# Altium PCB GasMonitor5.PcbDoc (part 2 of 2)
Units mm, origin at the board's own origin, x right, y up, seen from the top; angles counter-clockwise.
Board outline 104.39 x 129.79 mm, 4 copper layers (Top Layer, Ground Layer, Power Layer, Bottom Layer), stack 0.75 mm thick; 155 components, 106 nets, 508 pads, 201 vias.
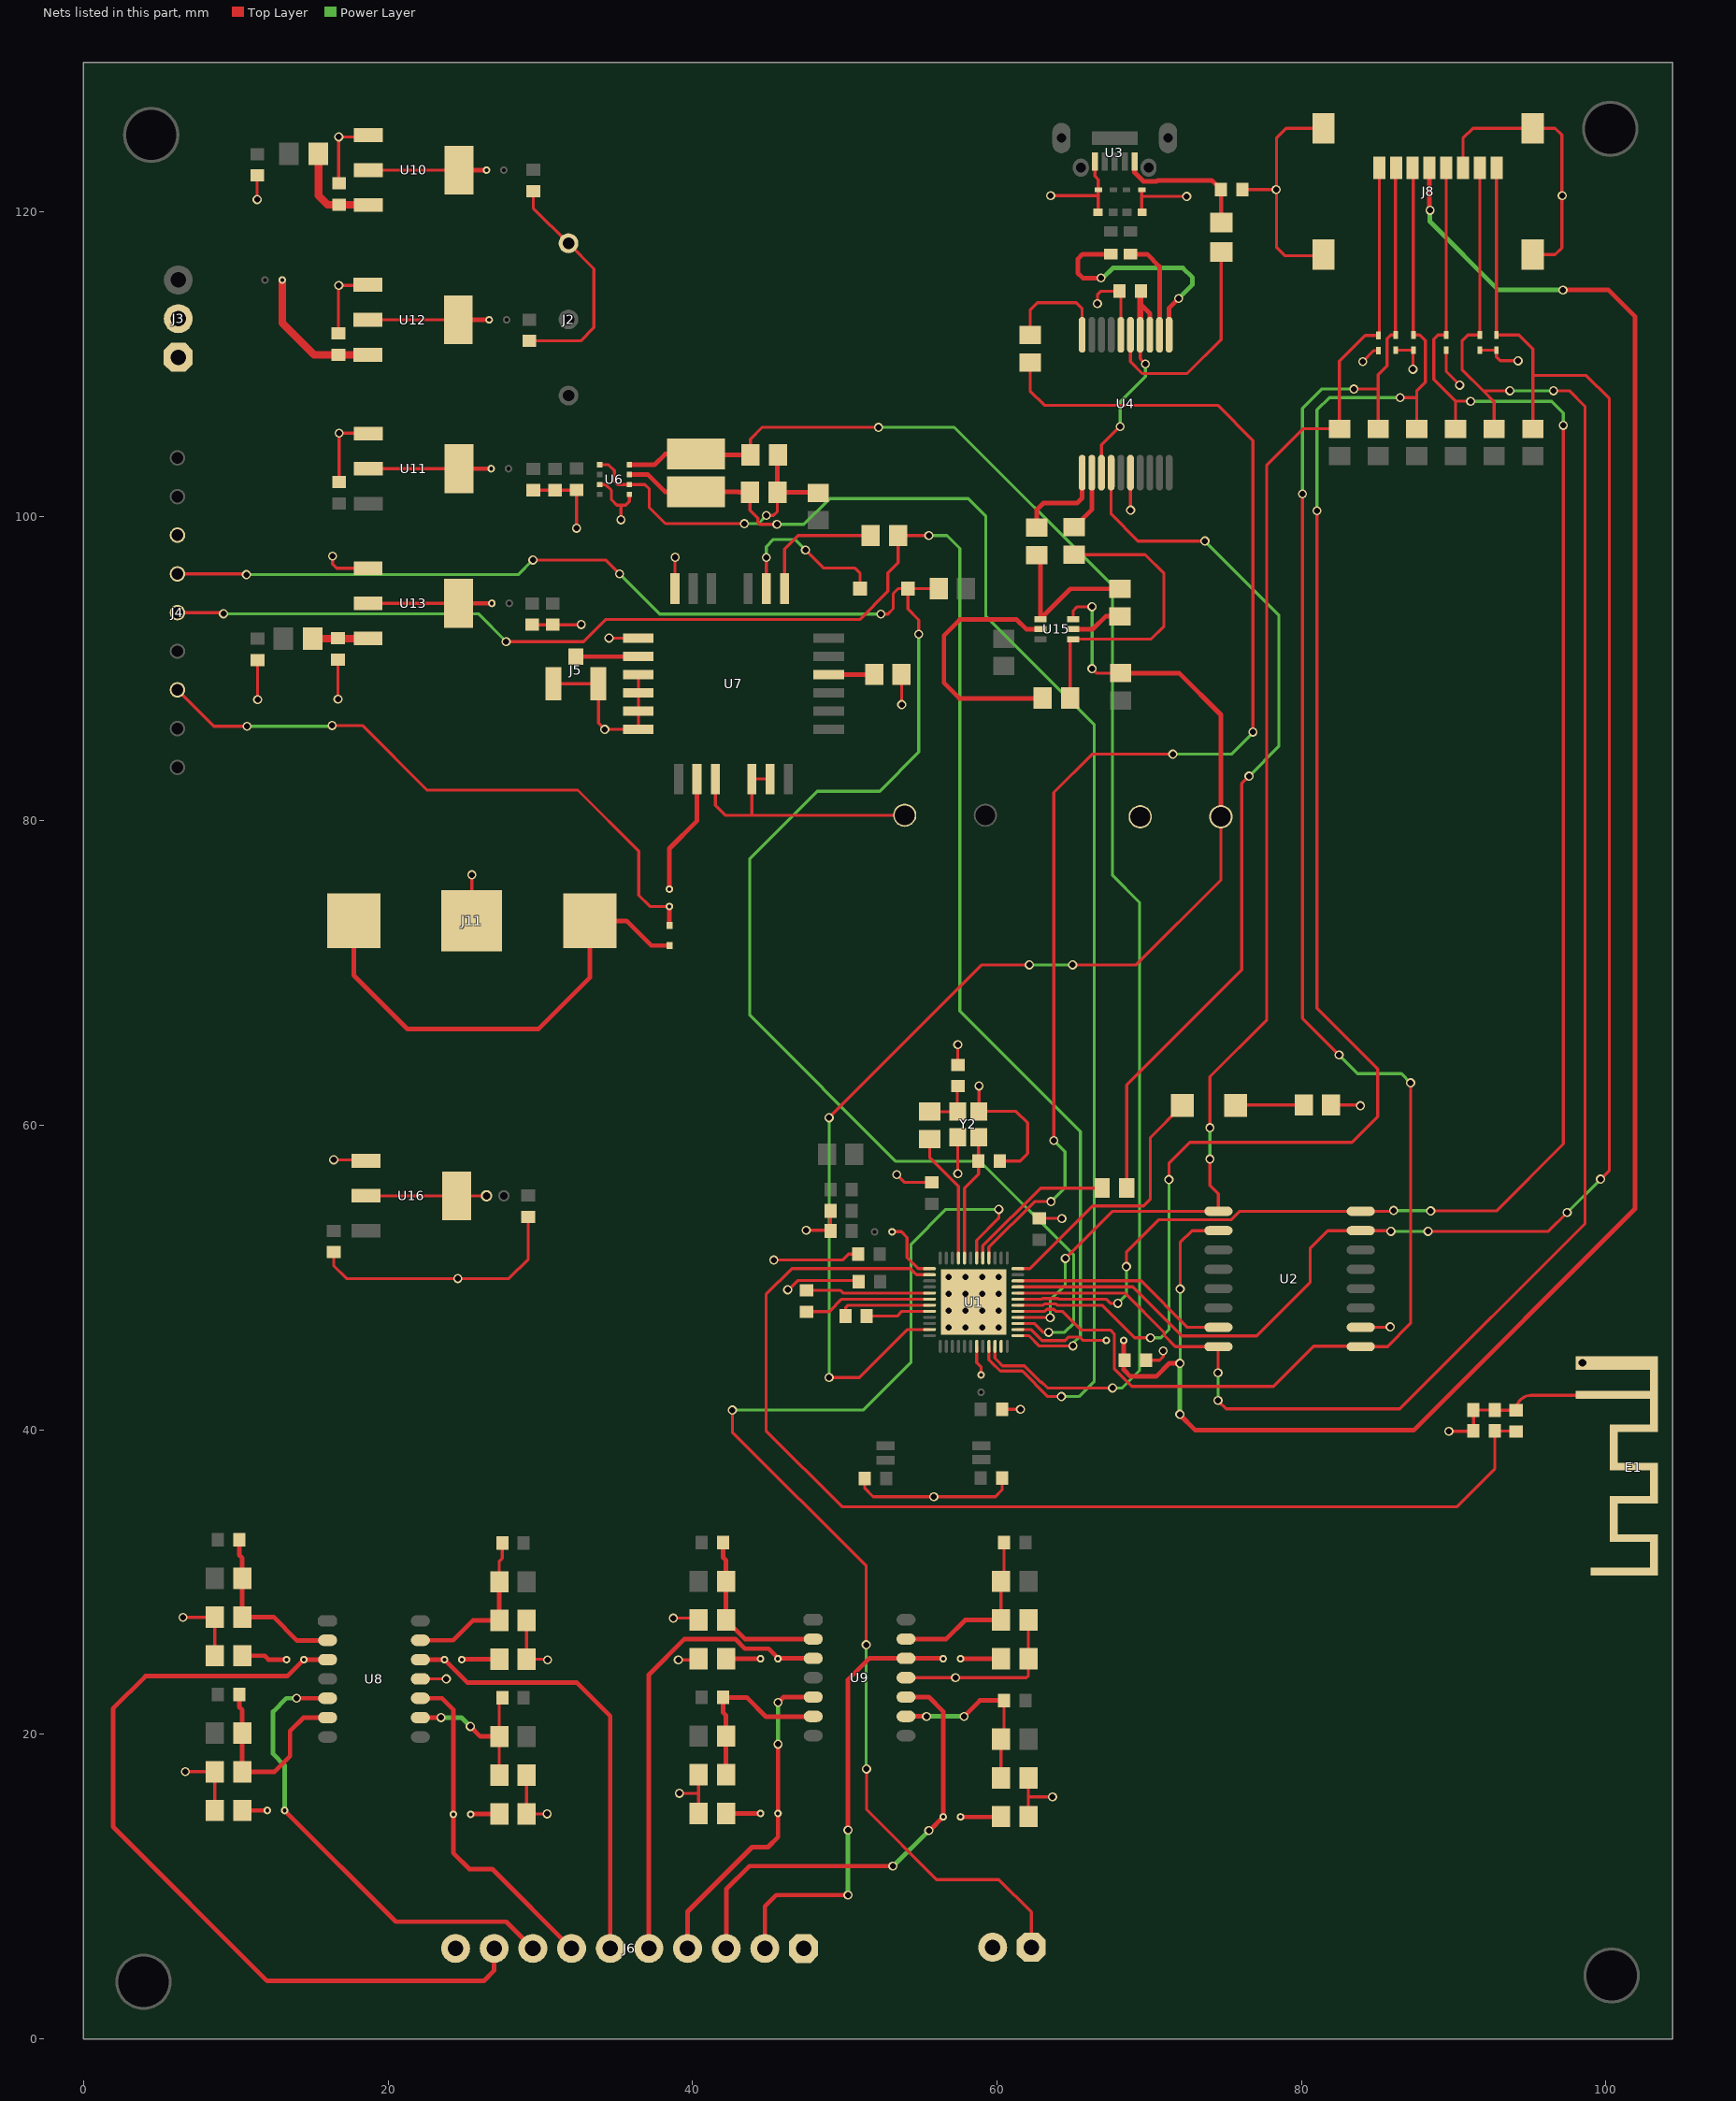
[diagram p4: the nets of this part, all layers, seen from the top]

## Via types
v1: diameter 0.6, hole 0.4, Top Layer to Bottom Layer, 195 vias
v2: diameter 1.27, hole 0.711, Top Layer to Bottom Layer, 5 vias
v3: diameter 0.7, hole 0.5, Top Layer to Bottom Layer, 1 vias

## Nets (pads, with @x,y where several pads share a name; then routed paths per layer and width w, separated by ;. In a path a pad name is that pad's centre, name@x,y a point inside that pad or via, vN(x,y) a via of type N, cw(c..) or ccw(c..) an arc to the next point about the centre after c; other vN are vias at no path point) (continued)
GND: C1.1 C2.1 C3.1 C4.1 C5.1 C6.1 C7.1 C9.1 C10.1 C10.2 C11.2 C14.1 C15.1 C16.2 C17.2 C18.1 C19.1 C20.1 C21.1 C22.1 C23.1 C24.1 C33.1 C34.1 C36.1 C37.2 C38.1 C39.2 C40.1 C41.2 C42.1 C43.1 C44.1 C45.1 D2.1 D3.1 D4.1 D5.1 D6.1 D7.1 D8.1 D9.1 E1.1 J1.2 J2.1 J3.1 J3.2 J4.7 J5.GND J6.1 J6.10 J8.6 J8.9 J8.10 J8.11 J8.12 J11.2 L1.1 R6.1 R17.1 R19.1 R20.1 R22.1 R23.1 R25.1 R26.1 R28.1 R29.1 R31.1 R32.1 R34.1 R35.1 R37.1 R38.1 R40.1 R41.1 S1_BOOT.1 S2_RESET.1 U1.49 U2.10 U3.5 U4.6 U4.16 U6.1 U6.7 U7.1 U7.3 U7.4 U7.5 U7.6 U7.9 U7.10 U7.11 U7.24 U8.11 U9.11 U10.1 U11.1 U12.1 U13.1 U16.1 Y2.2 Y2.4 | length 275
  Top Layer w0.2: v1(6.528,27.686) R19.1@8.605,27.686 ; v1(6.68,17.551) R22.1@8.619,17.551 ; R23.1@8.625,15.006 R22.1@8.625,17.546 ; R20.1@8.625,25.166 R19.1@8.625,27.706 ; v1(11.405,120.802) C45.1@11.405,122.388 ; v1(11.43,87.96) C42.1@11.43,90.562 ; v1(16.358,97.384) 16.358,96.85 16.623,96.585 U13.1@18.691,96.585 ; C33.1@16.434,51.675 16.434,50.775 17.272,49.936 v1(24.587,49.936) 27.94,49.936 29.21,51.206 C34.1@29.21,53.986 ; v1(16.434,57.734) U16.1@18.502,57.734 ; v1(16.713,87.986) C43.1@16.713,90.588 ; C40.1@16.739,112.003 v1@16.739,115.138 ; v1(16.764,115.164) 18.604,115.164 U12.1@18.654,115.214 ; C38.1@16.789,102.249 v1(16.789,105.461) 18.68,105.461 U11.1@18.717,105.424 ; C36.1@16.789,121.858 16.815,121.883 16.688,122.01 16.764,122.087 v1(16.764,124.917) U10.1@18.601,124.917 ; U8.11@22.123,23.642 v1@23.82,23.642 ; J11.2@25.502,73.431 v1(25.502,76.454) ; R25.1@29.105,17.323 R26.1@29.105,14.783 v1(30.455,14.783) ; R28.1@29.105,27.483 R29.1@29.105,24.943 v1@30.429,24.943 ; C41.2@29.286,111.517 32.65,111.517 33.528,112.395 33.528,116.252 J2.1@31.852,117.928 29.54,120.24 C37.2@29.54,121.347 ; C44.1@29.464,92.874 C24.1@30.81,92.874 v1@32.676,92.874 ; C39.2@29.54,101.713 C23.1@32.36,101.713 ; J5.GND@30.859,89.006 J5.GND@33.809,89.006 ; v1(32.385,99.212) C23.1@32.385,101.738 ; J5.GND@33.833,88.982 33.833,86.411 v1(34.239,86.004) U7.6@36.445,86.004 ; U6.7@33.899,102.088 34.285,102.088 34.671,101.702 34.671,101.092 35.027,100.736 35.611,100.736 35.849,100.975 U6.1@35.849,101.438 ; v1(34.519,91.999) U7.1@36.445,91.999 ; v1(35.306,99.771) 35.306,100.686 ; U7.6@36.447,86.002 U7.5@36.447,87.202 U7.4@36.447,88.402 U7.3@36.447,89.602 ; v1(38.735,27.635) R31.1@40.274,27.635 ; U7.24@38.847,95.252 v1@38.847,97.293 ; v1(39.065,24.892) R32.1@40.323,24.892 ; v1(39.141,16.129) 40.4,16.129 ; R35.1@40.4,14.809 40.4,16.129 ; R34.1@40.4,17.349 40.4,16.129 ; U7.9@41.497,82.752 41.497,81.007 42.139,80.366 S2_RESET.1@53.941,80.366 ; 43.897,80.366 U7.10@43.897,82.752 U7.11@45.097,82.752 ; v1(45.339,51.156) 49.86,51.156 50.241,51.537 C3.1@50.887,51.537 ; v1(46.253,49.2) 46.331,49.2 46.944,49.813 C4.1@50.833,49.813 ; v1(47.473,53.111) C2.1@49.008,53.111 ; C2.1@49.059,53.061 C9.1@49.059,54.381 ; C14.1@51.319,36.805 51.319,36.158 51.867,35.611 59.893,35.611 60.339,36.057 C15.1@60.339,36.83 ; v1(53.416,56.769) 53.935,56.25 C1.1@55.728,56.25 ; v1@53.732,87.644 R17.1@53.732,89.611 ; U9.11@54.026,23.724 61.925,23.724 62.063,23.862 R41.1@62.063,24.969 R40.1@62.063,27.509 ; Y2.2@57.415,59.221 57.429,59.207 v1(57.429,56.82) ; C16.2@57.429,63.971 v1(57.429,65.303) ; Y2.4@58.815,60.921 61.253,60.921 62.015,60.159 62.015,58.154 61.519,57.658 C17.2@60.187,57.658 ; Y2.4@58.826,60.932 v1(58.826,62.586) ; C6.1@60.339,41.351 v1(61.544,41.351) ; R38.1@62.063,14.606 R37.1@62.063,17.146 ; 62.114,15.9 v1(63.652,15.9) ; C5.1@62.789,53.888 v1@64.248,53.888 ; v1(63.525,121.056) 66.632,121.056 ; U3.5@66.437,123.292 66.437,122.336 66.658,122.115 D3.1@66.658,121.437 C19.1@66.658,119.99 ; v1(66.599,113.97) 66.599,114.554 66.827,114.783 C21.1@68.058,114.783 ; U4.16@68.135,111.916 C21.1@68.135,114.705 ; v1@68.77,100.419 U4.6@68.77,102.866 ; C18.1@69.512,119.99 D2.1@69.512,121.437 ; 69.537,121.006 v1(72.466,121.006) ; C7.1@69.788,44.577 70.688,44.577 70.917,44.806 v1(70.917,45.187) ; C20.1@76.113,121.463 v1@78.359,121.463 ; J8.11@81.441,117.185 81.363,117.107 78.93,117.107 78.359,117.678 v1@78.359,121.463 ; J8.12@81.441,125.485 79.003,125.485 78.359,124.841 v1@78.359,121.463 ; R6.1@81.951,61.341 v1@83.82,61.341 ; U2.10@83.898,46.736 v1@85.801,46.736 ; v1(84.023,110.16) 84.742,110.879 D9.1@85.065,110.879 ; D8.1@86.182,110.904 D7.1@87.351,110.904 ; v1(87.325,109.652) D7.1@87.325,110.879 ; D6.1@89.51,110.904 89.51,109.499 v1(90.399,108.61) ; v1(89.687,39.903) L1.1@91.273,39.903 ; J8.6@90.611,122.885 90.611,124.825 91.271,125.485 J8.9@95.191,125.485 96.663,125.485 97.104,125.044 97.104,117.627 96.662,117.185 J8.10@95.191,117.185 ; L1.1@91.299,39.929 C10.1@91.299,41.3 C10.2@92.688,41.3 ; D5.1@91.719,110.904 D4.1@92.812,110.904 92.812,110.465 93.066,110.211 v1(94.234,110.211) ; C10.2@92.699,41.3 92.699,41.289 C11.2@94.107,41.289 cw(c95.083,41.289) 95.083,42.266 100.423,42.266 ccw(c100.423,42.299) E1.1@100.457,42.299
  other v1: 23.825,23.647 57.277,23.724 30.48,24.892 55.855,35.611 56.821,46.737 57.921,46.737 59.021,46.737 60.121,46.737 85.827,46.761 56.821,47.837 57.921,47.837 59.021,47.837 60.121,47.837 56.821,48.937 57.921,48.937 59.021,48.937 60.121,48.937 56.821,50.037 57.921,50.037 59.021,50.037 60.121,50.037 64.262,53.873 83.871,61.29 53.746,87.63 32.69,92.888 38.862,97.307 68.783,100.406 97.13,121.056 78.334,121.463
  other v3: 98.457,44.399
GPIO0: U1.23
GPIO35: R5.1 S1_BOOT.2 U1.11 U15.6 | length 83.6
  Top Layer w0.2: v1(48.977,43.434) 50.965,43.434 54.118,46.587 U1.11@55.571,46.587 ; v1(48.977,60.497) 59.015,70.536 v1@62.052,70.536 ; v1(64.973,70.536) 69.139,70.536 74.71,76.107 S1_BOOT.2@74.71,80.264 ; U15.6@65.007,93.233 65.007,93.785 65.278,94.056 v1(66.243,94.056) ; v1(66.243,89.992) 66.537,89.698 R5.1@68.123,89.698
  Top Layer w0.3: R5.1@68.123,89.698 71.973,89.698 74.71,86.961 S1_BOOT.2@74.71,80.264
  Power Layer w0.2: v1(48.977,43.434) v1(48.977,60.497) ; v1(62.128,70.536) v1(64.973,70.536) ; v1(66.243,89.992) v1(66.243,94.056)
GPS_RX: D10.2 J4.6 R16.1 U1.27 | length 124.9
  Top Layer w0.2: J4.6@6.172,96.215 10.643,96.215 v1(10.693,96.164) ; v1(29.515,97.13) 34.29,97.13 v1(35.204,96.215) ; v1(52.375,93.574) 52.832,93.574 53.188,93.929 53.188,94.92 53.518,95.25 D10.2@54.153,95.25 ; v1(54.864,92.253) 54.864,93.193 54.153,93.904 D10.2@54.153,95.25 ; R16.1@56.174,95.25 D10.2@54.153,95.25 ; U1.27@61.371,46.987 62.436,46.987 63.017,46.406 v1(63.398,46.406)
  Power Layer w0.2: v1(10.693,96.164) 28.55,96.164 v1(29.515,97.13) ; v1(35.204,96.215) 37.846,93.574 v1(52.375,93.574) ; v1(54.864,92.253) 54.864,84.506 52.299,81.94 48.184,81.94 43.764,77.521 43.764,67.234 53.365,57.633 57.182,57.633 57.187,57.638 58.888,57.638 65.041,51.485 65.041,47.007 64.44,46.406 v1(63.398,46.406)
GPS_TX: J4.5 R18.1 U1.25 | length 116.9
  Top Layer w0.2: J4.5@6.172,93.675 9.119,93.675 v1(9.195,93.599) ; v1(27.762,91.77) 32.842,91.77 34.29,93.218 50.978,93.218 52.832,95.072 52.832,96.291 53.503,96.963 R18.1@53.503,98.73 v1(55.524,98.73) ; U1.25@61.371,46.187 62.093,46.187 62.774,45.506 64.988,45.506 v1(64.999,45.517)
  Power Layer w0.2: v1(9.195,93.599) 25.933,93.599 v1(27.762,91.77) ; v1(55.524,98.73) 56.718,98.73 57.556,97.892 57.556,67.513 65.481,59.588 65.481,46.177 64.999,45.695 v1(64.999,45.517)
LNA_IN: C11.1 L1.2 U1.2 | length 75.4
  Top Layer w0.2: 54.678,50.237 54.318,50.597 46.533,50.597 44.831,48.895 44.831,39.947 49.828,34.95 90.221,34.95 92.699,37.428 L1.2@92.699,39.929 94.067,39.929 cw(c94.067,39.889) C11.1@94.107,39.889 ; 54.728,50.187 U1.2@55.571,50.187
NetC16_1: C16.1 R3.2 Y2.1 | length 3.5
  Top Layer w0.2: R3.2@55.575,60.895 57.389,60.895 C16.1@57.389,62.531
NetC20_2: C20.2 FB2.1 U3.1 | length 9.1
  Top Layer w0.3: U3.1@69.037,123.292 69.037,122.575 69.62,121.992 70.476,121.992 70.547,122.063 74.113,122.063 C20.2@74.713,121.463 74.727,121.449 FB2.1@74.727,119.304
NetC21_2: C21.2 U4.3 U4.13 U4.14 | length 15.5
  Top Layer w0.2: U4.3@66.865,102.866 66.865,104.686 68.072,105.893 v1(68.097,105.893) ; U4.14@69.406,111.916 69.406,110.35 v1(69.748,110.007)
  Top Layer w0.3: 69.444,113.919 70.04,113.322 U4.13@70.04,111.916
  Top Layer w0.4: U4.14@69.406,111.916 C21.2@69.406,114.783
  Power Layer w0.2: v1(68.097,105.893) 68.097,107.518 69.748,109.169 v1(69.748,110.007)
NetC25_1: C25.1 R19.2 R42.1 U8.2 | length 11.4
  Top Layer w0.3: C25.1@10.225,32.786 10.225,31.787 10.425,31.587 R42.1@10.425,30.246 R19.2@10.425,27.706 12.477,27.706 14.021,26.162 16.008,26.162 U8.2@16.027,26.182
NetC26_1: C26.1 R21.1 R22.2 U8.6 | length 13.6
  Top Layer w0.2: U8.6@15.779,20.853 U8.6@16.027,21.102
  Top Layer w0.3: C26.1@10.225,22.626 10.225,21.804 10.425,21.604 R21.1@10.425,20.086 R22.2@10.425,17.546 12.542,17.546 13.564,18.567 13.564,20.218 14.447,21.102 U8.6@16.027,21.102
NetC27_1: C27.1 R24.1 R25.2 U8.9 | length 10.6
  Top Layer w0.2: R25.2@27.305,17.323 R24.1@27.305,19.863 C27.1@27.305,22.203
  Top Layer w0.3: U8.9@22.123,21.102 v1(23.475,21.102) ; v1(25.4,20.523) 26.06,19.863 R24.1@27.305,19.863
  Power Layer w0.3: v1(23.475,21.102) 24.821,21.102 v1(25.4,20.523)
NetC28_1: C28.1 R27.1 R28.2 U8.13 | length 10.9
  Top Layer w0.2: R27.1@27.305,30.023 27.305,31.369 27.505,31.569 C28.1@27.505,32.563
  Top Layer w0.3: U8.13@22.123,26.182 24.277,26.182 25.578,27.483 R28.2@27.305,27.483 R27.1@27.305,30.023
NetC29_1: C29.1 R30.1 R31.2 U9.2 | length 11.4
  Top Layer w0.3: C29.1@42,32.589 42,31.634 42.2,31.434 R30.1@42.2,30.049 R31.2@42.2,27.509 43.446,26.264 U9.2@47.93,26.264
NetC30_1: C30.1 R33.1 R34.2 U9.6 | length 11.6
  Top Layer w0.3: R34.2@42.2,17.349 R33.1@42.2,19.889 42.2,21.249 42,21.449 C30.1@42,22.429 43.56,22.429 44.829,21.16 47.906,21.16 U9.6@47.93,21.184
NetC31_1: C31.1 R36.1 R37.2 U9.9 | length 12
  Top Layer w0.2: R37.2@60.263,17.146 R36.1@60.263,19.686 60.463,19.886 C31.1@60.463,22.226
  Top Layer w0.3: U9.9@54.026,21.184 v1(55.372,21.184) ; v1(57.836,21.184) 58.878,22.226 C31.1@60.463,22.226
  Power Layer w0.3: v1(55.372,21.184) v1(57.836,21.184)
NetC32_1: C32.1 R39.1 R40.2 U9.13 | length 11.9
  Top Layer w0.2: R40.2@60.263,27.509 R39.1@60.263,30.049 60.463,30.249 C32.1@60.463,32.589
  Top Layer w0.3: U9.13@54.026,26.264 56.667,26.264 57.913,27.509 R40.2@60.263,27.509
NetC36_2: C36.2 FB1.2 U10.3 | length 6.2
  Top Layer w0.5: FB1.2@15.432,123.8 15.432,121.067 16.042,120.458 C36.2@16.789,120.458 U10.3@18.691,120.458
NetC40_2: C40.2 TP18.2 U12.3 | length 9.3
  Top Layer w0.5: TP18.2@13.056,115.494 13.056,112.7 15.153,110.603 C40.2@16.739,110.603 U12.3@18.666,110.603
NetC43_2: C43.2 FB3.2 U13.3 | length 3.6
  Top Layer w0.5: FB3.2@15.051,91.973 U13.3@18.68,91.973
NetD1_2: D1.2 R6.2 | length 4.4
  Top Layer w0.2: D1.2@75.715,61.341 R6.2@80.151,61.341
NetD10_1: D10.1 U7.20 | length 11
  Top Layer w0.2: U7.20@44.847,95.252 v1(44.847,97.298) ; v1(47.422,97.79) 48.616,96.596 50.673,96.596 51.003,96.266 D10.1@51.003,95.25
  Power Layer w0.2: v1(44.847,97.298) 44.847,98.01 45.314,98.476 46.736,98.476 v1(47.422,97.79)
NetD11_2: D11.2 J11.1 | length 31.6
  Top Layer w0.3: J11.1@17.752,73.431 17.752,69.853 21.285,66.319 29.87,66.319 33.252,69.701 J11.1@33.252,73.431 35.662,73.431 37.287,71.806 D11.2@38.481,71.806
NetFB2_2: FB2.2 U4.15 | length 14.7
  Top Layer w0.2: U4.15@68.77,111.916 68.77,110.147 69.545,109.372 72.492,109.372 74.727,111.608 FB2.2@74.727,117.359
NetJ1_1: J1.1 U1.42 | length 77.1
  Top Layer w0.2: v1(42.621,41.3) 42.621,39.853 51.41,31.064 v1(51.41,25.883) ; v1(51.435,17.729) 51.435,15.062 56.032,10.465 60.122,10.465 62.255,8.331 J1.1@62.255,6.02 ; U1.42@58.671,51.287 58.671,52.448 60.122,53.899 v1(60.122,54.483)
  Power Layer w0.2: v1(42.621,41.3) 51.206,41.3 54.356,44.45 54.356,52.197 56.642,54.483 v1(60.122,54.483) ; v1(51.41,25.883) 51.41,17.755 v1(51.435,17.729)
NetJ5_SIG: J5.SIG U7.2 | length 4.1
  Top Layer w0.3: J5.SIG@32.334,90.781 U7.2@36.426,90.781
NetJ6_2: J6.2 TP11.2 U9.12 | length 29.5
  Top Layer w0.3: J6.2@44.755,5.944 44.755,8.712 45.491,9.449 v1(50.216,9.449) ; v1(50.216,13.716) 50.216,23.597 51.613,24.994 U9.12@54.026,24.994 TP11.2@56.443,24.994
  Power Layer w0.3: v1(50.216,9.449) v1(50.216,13.716)
NetJ6_3: J6.3 TP10.2 U9.10 | length 29.9
  Top Layer w0.3: J6.3@42.215,5.944 42.215,9.83 43.739,11.354 v1(53.162,11.354) ; U9.10@54.026,22.454 55.524,22.454 56.467,21.511 TP10.2@56.467,14.58 55.578,13.691 v1(55.524,13.691)
  Power Layer w0.3: v1(53.162,11.354) 53.188,11.354 v1(55.524,13.691)
NetJ6_4: J6.4 TP9.2 U9.5 | length 21.7
  Top Layer w0.3: J6.4@39.675,5.944 39.675,8.357 43.917,12.598 44.958,12.598 45.615,13.256 TP9.2@45.615,14.809 v1(45.615,19.358) ; v1(45.615,22.095) 45.974,22.454 U9.5@47.93,22.454
  Power Layer w0.3: v1(45.615,19.358) v1(45.615,22.095)
NetJ6_5: J6.5 TP8.2 U9.3 | length 30.3
  Top Layer w0.3: J6.5@37.135,5.944 37.135,23.927 39.472,26.264 42.809,26.264 43.444,25.629 45.005,25.629 45.64,24.994 U9.3@47.93,24.994
NetJ6_6: J6.6 TP7.2 U8.12 | length 29.3
  Top Layer w0.3: U8.12@22.129,24.917 TP7.2@23.701,24.917 25.225,23.393 32.41,23.393 34.595,21.209 J6.6@34.595,5.944
NetJ6_7: J6.7 TP6.2 U8.10 | length 22.3
  Top Layer w0.3: U8.10@22.123,22.372 23.551,22.372 24.285,21.638 TP6.2@24.285,14.752 24.285,12.214 25.349,11.151 26.848,11.151 J6.7@32.055,5.944
NetJ6_8: J6.8 TP5.2 U8.5 | length 30.8
  Top Layer w0.3: TP5.2@13.205,15.006 20.515,7.696 27.762,7.696 J6.8@29.515,5.944 ; v1(13.99,22.372) U8.5@16.027,22.372
  Power Layer w0.3: TP5.2@13.205,15.006 13.205,17.961 12.446,18.72 12.446,21.488 13.329,22.372 v1(13.99,22.372)
NetJ6_9: J6.9 TP4.2 U8.3 | length 54.1
  Top Layer w0.3: U8.3@16.022,24.917 TP4.2@14.475,24.917 13.383,23.825 4.064,23.825 1.93,21.692 1.93,13.945 12.065,3.81 26.289,3.81 26.975,4.496 J6.9@26.975,5.944
NetR2_1: R2.1 U1.41 | length 10.2
  Top Layer w0.2: U1.41@59.071,51.287 59.071,52.086 62.865,55.88 R2.1@66.916,55.88
NetR7_2: R7.2 U4.12 | length 6.7
  Top Layer w0.3: R7.2@68.835,117.208 69.863,117.208 70.675,116.395 U4.12@70.675,111.916
NetR8_2: R8.2 U4.11 | length 15.8
  Top Layer w0.3: v1(66.827,115.646) 65.634,115.646 65.303,115.976 65.303,116.891 65.62,117.208 R8.2@67.488,117.208 ; U4.11@71.31,111.916 71.31,113.678 v1(71.933,114.3)
  Power Layer w0.3: v1(66.827,115.646) 66.954,115.646 67.615,116.307 72.212,116.307 72.847,115.672 72.847,115.214 v1(71.933,114.3)
NetR9_1: R9.1 U4.20 | length 7.1
  Top Layer w0.2: R9.1@62.179,111.898 62.179,113.538 62.662,114.021 65.202,114.021 65.596,113.627 U4.20@65.596,111.916
NetR10_1: R10.1 U4.2 | length 4.1
  Top Layer w0.3: R10.1@65.075,99.274 66.23,100.43 U4.2@66.23,102.866
NetR10_2: R10.2 R13.1 U15.4 | length 19.8
  Top Layer w0.2: R13.1@64.806,88.062 64.806,91.733 ; U15.4@65.007,91.933 70.114,91.933 70.968,92.786 70.968,96.241 69.734,97.474 R10.2@65.075,97.474
NetR11_1: R11.1 U4.1 | length 6.1
  Top Layer w0.3: R11.1@62.611,99.249 62.611,100.432 63.043,100.863 65.253,100.863 65.596,101.206 U4.1@65.596,102.866
NetR11_2: R11.2 R12.2 U15.1 | length 10
  Top Layer w0.3: R11.2@62.857,97.203 62.857,93.268 64.824,95.236 R12.2@68.072,95.236
NetR12_1: R12.1 U15.5 | length 3.4
  Top Layer w0.3: U15.5@65.007,92.583 66.294,92.583 67.147,93.436 R12.1@68.072,93.436
NetR13_2: R13.2 U15.2 | length 17.1
  Top Layer w0.3: U15.2@62.857,92.583 61.925,92.583 61.29,93.218 57.556,93.218 56.515,92.177 56.515,89.052 57.526,88.041 60.906,88.041 62.986,88.041 R13.2@63.006,88.062
NetR14_2: R14.2 R15.2 R44.1 U6.2 U6.5 | length 21.1
  Top Layer w0.2: U6.5@33.899,103.388 34.483,103.388 34.874,102.997 34.874,102.311 35.098,102.088 U6.2@35.849,102.088 36.876,102.088 37.16,101.803 37.16,100.584 38.227,99.517 v1(43.409,99.517) ; v1(44.856,100.051) 45.314,100.051 45.579,100.316 R15.2@45.579,101.575
  Top Layer w0.3: R14.2@45.579,104.013 R15.2@45.579,101.575 R44.1@48.22,101.575
  Power Layer w0.2: v1(43.409,99.517) 44.323,99.517 v1(44.856,100.051)
NetR17_2: R17.2 U7.16 | length 3
  Top Layer w0.3: U7.16@48.947,89.602 48.957,89.611 R17.2@51.932,89.611
NetR18_2: R18.2 U7.19 | length 8.6
  Top Layer w0.2: U7.19@46.047,95.252 46.047,97.838 46.939,98.73 R18.2@51.703,98.73
NetR20_2: R20.2 TP4.1 | length 3
  Top Layer w0.3: R20.2@10.425,25.166 11.893,25.166 12.141,24.917 TP4.1@13.335,24.917
NetR23_2: R23.2 TP5.1 | length 1.6
  Top Layer w0.3: R23.2@10.425,15.006 TP5.1@12.065,15.006
NetR26_2: R26.2 TP6.1 | length 1.8
  Top Layer w0.3: TP6.1@25.456,14.783 R26.2@27.305,14.783
NetR29_2: R29.2 TP7.1 | length 2.4
  Top Layer w0.3: TP7.1@24.867,24.943 R29.2@27.305,24.943
NetR32_2: R32.2 TP8.1 | length 2.3
  Top Layer w0.3: R32.2@42.2,24.969 TP8.1@44.475,24.969
NetR35_2: R35.2 TP9.1 | length 2.3
  Top Layer w0.3: R35.2@42.2,14.809 TP9.1@44.475,14.809
NetR38_2: R38.2 TP10.1 | length 2.6
  Top Layer w0.3: TP10.1@57.607,14.58 R38.2@60.237,14.58
NetR41_2: R41.2 TP11.1 | length 3.2
  Top Layer w0.2: R41.2@59.742,24.969 R41.2@60.263,24.969
  Top Layer w0.3: TP11.1@57.607,24.969 R41.2@60.263,24.969
NetTP2_1: TP2.1@26.467,55.372 U16.2 | length 7.9
  Top Layer w0.2: U16.2@18.564,55.372 U16.2@24.514,55.372 TP2.1@26.467,55.372
NetTP3_1: TP3.1 U7.8 | length 8
  Top Layer w0.3: TP3.1@38.481,75.514 38.481,78.181 40.297,79.998 U7.8@40.297,82.752
NetTP15_1: TP15.1 U10.2 | length 7.8
  Top Layer w0.2: U10.2@18.717,122.733 U10.2@24.667,122.733
  Top Layer w0.3: U10.2@24.667,122.733 TP15.1@26.467,122.733
NetTP17_1: TP17.1 U11.2 | length 8.1
  Top Layer w0.2: U11.2@18.717,103.124 U11.2@24.667,103.124
  Top Layer w0.3: U11.2@24.667,103.124 TP17.1@26.772,103.124
NetTP19_1: TP19.1 U12.2 | length 8
  Top Layer w0.2: U12.2@18.666,112.903 U12.2@24.616,112.903
  Top Layer w0.3: U12.2@24.616,112.903 TP19.1@26.645,112.903
NetTP21_1: TP21.1 U13.2 | length 8.1
  Top Layer w0.2: U13.2@18.691,94.285 U13.2@24.641,94.285
  Top Layer w0.3: U13.2@24.641,94.285 TP21.1@26.822,94.285
NetTP22_2: TP22.2 U1.1 | length 4.2
  Top Layer w0.2: TP22.2@53.108,53.01 53.721,53.01 54.098,52.633 54.098,51.312 54.823,50.587 U1.1@55.571,50.587
NetTP23_2: TP23.2 U1.19 | length 2
  Top Layer w0.2: U1.19@58.671,45.487 58.674,45.484 58.674,44.425 58.953,44.145 TP23.2@58.953,43.609
NetTP24_1: TP24.1 U1.26 | length 6.3
  Top Layer w0.2: U1.26@61.371,46.587 62.227,46.587 62.958,45.856 64.474,45.856 64.719,46.101 65.43,46.101 65.659,45.872 TP24.1@67.183,45.872
PWR_LED: D1.1 U1.36 | length 17.6
  Top Layer w0.2: U1.36@61.371,50.587 62.169,50.587 66.294,54.712 69.621,54.712 70.079,55.169 70.079,59.205 D1.1@72.189,61.316
SCK/CLK: D6.2 J8.5 R47.1 U1.31 U2.16 | length 115.7
  Top Layer w0.2: U1.31@61.371,48.587 62.948,48.587 62.982,48.621 64.018,48.621 64.052,48.587 67.161,48.587 67.437,48.311 v1(67.945,48.311) ; v1(68.504,50.724) 68.504,51.664 70.646,53.806 75.4,53.806 75.95,54.356 U2.16@83.898,54.356 v1@86.055,54.356 ; v1(88.494,54.381) 92.812,54.381 97.206,58.776 v1(97.206,105.969) ; J8.5@89.51,122.884 D6.2@89.51,111.904 88.968,111.904 88.697,111.633 88.697,108.991 90.119,107.569 ; R47.1@90.119,105.745 90.119,107.569 ; v1(91.11,107.544) 91.084,107.569 90.119,107.569
  Power Layer w0.2: v1(67.945,48.311) 68.504,48.87 v1(68.504,50.724) ; v1(86.055,54.407) 88.468,54.407 v1(88.494,54.381) ; v1(91.11,107.544) 96.444,107.544 97.206,106.782 v1(97.206,105.969)
SCL: R14.1 TP1.1 U1.22 U6.4 | length 101.6
  Top Layer w0.2: R14.1@43.804,104.038 43.804,105.069 44.577,105.842 v1(52.222,105.842) ; U1.22@59.871,45.487 59.871,44.713 60.003,44.58 60.003,44.568 60.362,44.21 61.809,44.21 62.915,43.104 ; 62.941,43.129 63.322,42.748 v1(67.589,42.748)
  Top Layer w0.25: TP1.1@40.234,104.089 TP1.1@40.284,104.038
  Top Layer w0.3: U6.4@35.849,103.388 37.507,103.388 38.209,104.089 TP1.1@40.234,104.089 ; TP1.1@40.284,104.038 R14.1@43.804,104.038
  Power Layer w0.2: v1(52.222,105.842) 57.201,105.842 67.589,95.453 67.589,76.403 69.367,74.625 69.367,43.891 68.224,42.748 v1(67.589,42.748)
"SCS/CMD FLASH": U1.34 U2.7 | length 14.4
  Top Layer w0.2: U1.34@61.371,49.787 69.466,49.787 72.517,46.736 U2.7@74.548,46.736
"SCS/CMD MICROSD": D7.2 J8.3 R48.1 U1.30 | length 110.1
  Top Layer w0.2: U1.30@61.371,48.187 63.043,48.187 63.127,48.271 63.873,48.271 63.957,48.187 66.9,48.187 69.037,46.05 v1(70.079,46.05) ; v1(71.298,56.439) 71.298,57.506 72.669,58.877 83.312,58.877 85.014,60.579 85.014,63.703 81.026,67.691 v1(81.026,100.355) ; v1(86.487,107.798) 87.554,107.798 ; J8.3@87.351,122.846 D7.2@87.351,111.904 87.765,111.904 88.138,111.531 88.138,108.814 87.579,108.255 R48.1@87.579,105.745
  Power Layer w0.2: v1(70.079,46.05) 70.764,46.05 71.298,46.584 71.298,56.591 71.323,56.566 v1@71.298,56.54 ; v1(81.026,100.355) 81.026,106.985 81.839,107.798 v1(86.487,107.798)
SD0: D5.2 J8.7 R46.1 U1.32 U2.8 | length 127.4
  Top Layer w0.2: U1.32@61.371,48.987 68.393,48.987 70.964,46.417 70.964,46.232 71.73,45.466 U2.8@74.548,45.466 ; v1(74.524,41.935) 74.524,41.91 75.057,41.377 86.462,41.377 98.628,53.543 98.628,107.213 97.599,108.242 v1(96.558,108.242) ; v1(74.524,43.739) U2.8@74.524,45.442 ; J8.7@91.711,122.885 91.719,122.877 D5.2@91.719,111.904 90.94,111.904 90.551,111.515 90.551,109.626 91.935,108.242 ; R46.1@92.659,105.745 92.659,107.518 91.935,108.242 ; v1(93.688,108.242) 91.935,108.242
  Power Layer w0.2: v1(74.524,41.935) v1(74.524,43.739) ; v1(93.688,108.242) v1(96.558,108.242)
SD1: D4.2 J8.8 R45.1 U1.33 U2.15 | length 121.3
  Top Layer w0.2: U1.33@61.371,49.387 68.926,49.387 72.136,46.177 77.064,46.177 80.569,49.682 80.569,51.918 81.737,53.086 U2.15@83.898,53.086 v1@85.827,53.086 ; v1(88.316,53.035) 96.215,53.035 v1(97.46,54.28) ; J8.8@92.811,122.885 D4.2@92.812,111.904 94.293,111.904 95.199,110.998 95.199,109.245 ; R45.1@95.199,105.745 95.199,109.245 ; v1(99.644,56.464) 100.228,57.048 100.228,107.721 98.704,109.245 95.199,109.245
  Power Layer w0.2: v1(85.877,53.035) v1(88.316,53.035) ; v1(97.46,54.28) v1(99.644,56.464)
SDA: R15.1 TP2.1@40.234,101.6 U1.21 U6.3 | length 95.8
  Top Layer w0.2: R15.1@43.779,101.575 43.779,100.399 44.294,99.884 44.294,99.597 44.425,99.466 v1(45.542,99.466) ; U1.21@59.471,45.487 59.471,44.618 59.653,44.435 59.653,44.423 60.216,43.86 61.664,43.86 63.335,42.189 v1(64.237,42.189)
  Top Layer w0.25: 43.028,101.6 43.054,101.575
  Top Layer w0.3: U6.3@35.849,102.738 37.071,102.738 38.209,101.6 TP2.1@40.234,101.6 43.028,101.6 ; 43.054,101.575 R15.1@43.779,101.575
  Power Layer w0.2: v1(45.542,99.466) 47.32,99.466 49.022,101.168 58.115,101.168 59.258,100.025 59.258,93.447 66.396,86.309 66.396,43.205 65.38,42.189 v1(64.237,42.189)
SENSOR_CAPN: C13.1 U1.7 | length 6.1
  Top Layer w0.2: C13.1@50.049,47.473 50.049,48.017 50.219,48.187 U1.7@55.571,48.187
SENSOR_CAPP: C12.1 U1.6 | length 8.4
  Top Layer w0.2: C12.1@47.498,47.763 48.982,47.763 49.806,48.587 U1.6@55.571,48.587
SENSOR_VN: C13.2 U1.8 | length 4.3
  Top Layer w0.2: C13.2@51.449,47.473 53.442,47.473 53.756,47.787 U1.8@55.571,47.787
SENSOR_VP: C12.2 U1.5 | length 8.1
  Top Layer w0.2: C12.2@47.498,49.163 49.719,49.163 49.895,48.987 U1.5@55.571,48.987
SHD/SD2: D9.2 J8.1 R50.1 U1.28 U2.1 | length 93
  Top Layer w0.2: U1.28@61.371,47.387 63.484,47.387 v1(63.5,47.371) ; v1(64.491,51.257) 67.589,54.356 U2.1@74.548,54.356 74.548,55.5 73.99,56.058 v1(73.99,57.785) ; v1(73.99,59.842) 73.99,63.195 77.724,66.929 77.724,103.378 80.091,105.745 R50.1@82.499,105.745 82.499,110.185 84.193,111.879 D9.2@85.065,111.879 ; D9.2@85.111,111.926 J8.1@85.111,122.885
  Power Layer w0.2: v1(63.5,47.371) 63.5,48.539 64.491,49.53 v1(64.491,51.257) ; v1(73.99,57.785) v1(73.99,59.842)
SWP/SD3: D8.2 J8.2 R49.1 U1.29 U2.9 | length 119
  Top Layer w0.2: U1.29@61.371,47.787 63.138,47.787 63.272,47.921 63.728,47.921 63.862,47.787 64.278,47.787 65.507,46.558 67.437,46.558 67.716,46.279 67.716,43.993 68.855,42.854 78.16,42.854 80.797,45.491 U2.9@83.872,45.491 ; v1(80.061,101.473) 80.061,67.031 v1(82.474,64.618) ; v1(83.439,108.356) 85.014,108.356 ; U2.9@83.898,45.466 85.649,45.466 87.173,46.99 v1(87.173,62.789) ; R49.1@85.039,105.745 85.039,109.296 85.623,109.88 85.623,111.658 85.869,111.904 D8.2@86.182,111.904 86.182,122.856 J8.2@86.211,122.885
  Power Layer w0.2: v1(80.061,101.473) 80.061,107.086 81.331,108.356 v1(83.439,108.356) ; v1(82.474,64.618) 83.693,63.398 86.563,63.398 v1(87.173,62.789)
U0RXD: R9.2 U1.40 | length 85.3
  Top Layer w0.2: U1.40@59.471,51.287 59.471,51.991 62.471,54.991 v1(63.551,54.991) ; R9.2@62.179,110.098 62.179,108.229 63.119,107.29 74.498,107.29 76.81,104.978 v1(76.81,85.827) ; v1(63.729,59.004) 63.729,81.864 66.243,84.379 v1(71.552,84.379)
  Power Layer w0.2: v1(63.551,54.991) 64.465,55.905 64.465,58.268 v1(63.729,59.004) ; v1(71.552,84.379) 75.413,84.379 76.81,85.776 v1(76.81,85.827)
U0TXD: R2.2 U4.4 | length 58.3
  Top Layer w0.2: U4.4@67.501,102.866 67.501,100.139 69.266,98.374 v1(73.66,98.374) ; R2.2@68.516,55.88 68.516,62.649 76.073,70.206 76.073,82.448 v1(76.556,82.931)
  Power Layer w0.2: v1(73.66,98.374) 78.511,93.523 78.511,84.887 v1(76.556,82.931)
VBACKUP: D11.1 J4.3 TP3.2 | length 41.2
  Top Layer w0.2: J4.3@6.172,88.595 8.56,86.208 v1(10.744,86.208) ; v1(16.332,86.258) 18.313,86.258 22.555,82.017 32.461,82.017 36.474,78.003 36.474,75.108 37.208,74.374 TP3.2@38.481,74.374
  Top Layer w0.3: D11.1@38.481,73.126 TP3.2@38.481,74.374
  Power Layer w0.2: v1(10.744,86.208) 16.281,86.208 v1(16.332,86.258)
VDD_SDIO: C7.2 J8.4 TP24.2 U2.2 | length 134.8
  Top Layer w0.2: v1@72.009,40.996 v1(72.009,41.021) ; v1(72.034,49.251) 72.034,52.299 72.822,53.086 U2.2@74.548,53.086 ; v1@88.411,120.123 v1(88.443,120.091)
  Top Layer w0.3: TP24.2@68.323,45.872 68.323,43.952 68.765,43.51 70.46,43.51 71.323,44.374 v1(72.009,44.374) ; v1@72.009,40.996 73.025,39.98 87.376,39.98 101.905,54.508 101.905,113.132 100.178,114.859 v1(97.18,114.859) ; v1@88.411,120.123 J8.4@88.411,122.885
  Power Layer w0.2: v1(72.009,44.374) 72.034,44.399 v1(72.034,49.251)
  Power Layer w0.3: v1(72.009,41.021) v1(72.009,44.374) ; v1(88.443,120.091) 88.443,119.355 92.939,114.859 v1(97.18,114.859)
XTAL_N: C17.1 U1.44 Y2.3 | length 8.3
  Top Layer w0.2: U1.44@57.871,51.287 57.871,55.864 58.787,56.78 C17.1@58.787,57.658 58.787,59.193 Y2.3@58.815,59.221
XTAL_P: R3.1 U1.45 | length 8.6
  Top Layer w0.2: R3.1@55.575,59.095 55.575,57.887 57.471,55.991 U1.45@57.471,51.287
pads on no net: J4.1 J4.2 J4.4 J4.9 U1.38 U1.39 U2.3 U2.4 U2.5 U2.6 U2.11 U2.12 U2.13 U2.14 U3.0 U3.4 U3.9 U4.5 U4.7 U4.8 U4.9 U4.10 U4.17 U4.18 U4.19 U7.12 U7.13 U7.14 U7.15 U7.17 U7.18 U7.21 U7.22 U7.23 Y1.3 Y1.4

## Polygon pours and split planes (outlines as drawn)
GND on Bottom Layer "Bottom GND Layer" (solid, remove dead copper, pour order 24): 0,0 97.993,0 97.993,129.794 0,129.794 0,0
GND on Ground Layer "Ground Layer" (solid, remove dead copper, pour order 26): 0,129.794 97.993,129.794 97.993,0 0,0 0,129.794

## Keep-outs
Top Layer:
  circle w0.254: c100.381,4.166 r2.5
  circle w0.254: c3.937,3.759 r2.5
  circle w0.254: c100.279,125.451 r2.5
  circle w0.254: c4.445,125.044 r2.5
Keep-Out Layer:
  lines w0.254: -0.203,-0.203 104.623,-0.203 104.623,129.972 -0.203,129.972 -0.203,-0.203

## Silkscreen, mask and mechanical layers (free items; w line width, h text height)
Top Overlay:
  text "+3.3V MCU" at 25.375,126.34 h0.6
  text "+3.3V TEMP" at 25.4,116.053 h0.6
  text "+14V VBAT" at 3.658,107.747 h0.6
  text "+3.3V BME" at 25.324,106.68 h0.6
  text "+3.3V GPS" at 25.654,98.476 h0.6
  text "+5V OUT" at 25.197,58.649 h0.6
  text "MFG Note: 2.4GHz inverted-F ANT. / Sensitive to added copper!" at 98.552,28.042 h0.8 r270
  text "Vivienne Jaehn-Kreibaum / VAMoS 2019" at 7.493,0.889 h0.6
  text "PUMP" at 59.919,0.711 h0.6